# Altium PCB sigjumper.PcbDoc (part 2 of 5)
Units mil, origin at the board's own origin, x right, y up, seen from the top; angles counter-clockwise.
Board outline 7874.02 x 2559.06 mil, 14 copper layers (TOP, P1(GND), S1(V), P2(GND), S2(H), P3(GND), S3(V12/V2V5), S4(VDDR), P4(GND), S5(V), P5(GND), S6(H), P6(GND), BOT), stack 115.1 mil thick; 22 components, 186 nets, 824 pads, 732 vias.
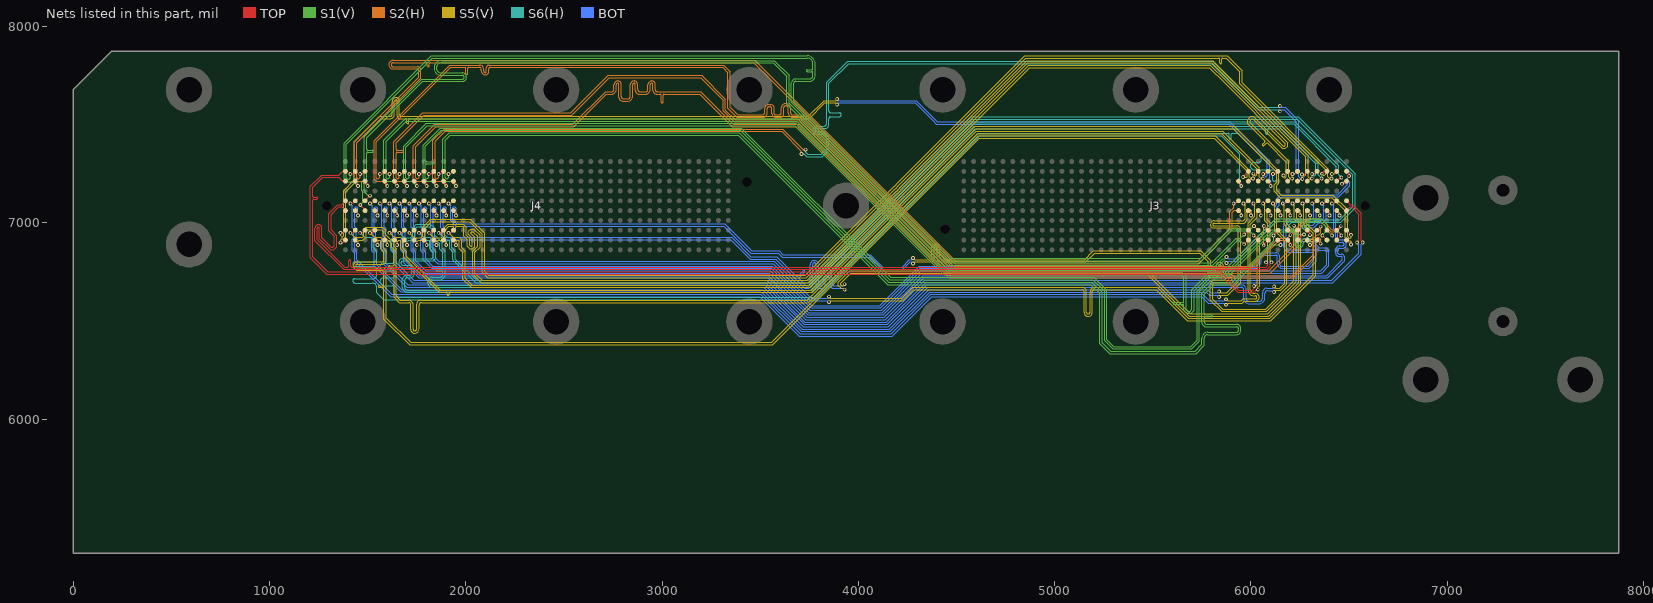
[diagram p14: the nets of this part, all layers, seen from the top]

## Via types
v1: diameter 19, hole 10, TOP to BOT, tented both sides, 732 vias

## Nets (pads, with @x,y where several pads share a name; then routed paths per layer and width w, separated by ;. In a path a pad name is that pad's centre, name@x,y a point inside that pad or via, vN(x,y) a via of type N, cw(c..) or ccw(c..) an arc to the next point about the centre after c; other vN are vias at no path point) (continued)
IL0.DDR.G0.D0_P: J3.72 J4.42 | length 5819.3
  TOP w4: J4.42@1587.2,6911.61 1600.7,6898.11 v1(1600.7,6886.61) ; v1(6111.81,7248.11) 6123.31,7248.11 J3.72@6136.81,7261.61
  S6(H) w4: v1(1600.7,6886.61) 1600.7,6902.52 1607.91,6909.73 1612.91,6909.73 1617.91,6904.73 1617.91,6867.09 1635,6850 1635,6801 cw(c1628,6801) 1628,6794 1582,6794 ccw(c1582,6775) 1563,6775 ccw(c1583,6775) 1583,6755 1625,6755 cw(c1625,6745) 1635,6745 1635,6726 cw(c1628,6726) 1628,6719 1582,6719 ccw(c1582,6700) 1563,6700 ccw(c1583,6700) 1583,6680 1625,6680 cw(c1625,6670) 1635,6670 1635,6640 1655,6620 3777,6620 4611.8,7454.8 5885.2,7454.8 cw(c5885.2,7450) 5890,7450 5890,7430 ccw(c5895,7430) 5895,7425 ccw(c5895,7430) 5900,7430 5900,7449.8 cw(c5905,7449.8) 5905,7454.8 5933.23,7454.8 6053.03,7335 6053.03,7315.03 6045,7307 6010.03,7307 5998,7294.97 5998,7280.03 6008.03,7270 6118.03,7270 6130,7258.03 6130,7218.5 6121.81,7210.31 6116.81,7210.31 6111.81,7215.31 v1(6111.81,7248.11)
IL0.DDR.G0.D1_N: J3.76 J4.46 | length 5774.9
  TOP w4: v1(1562.2,7098.11) 1573.7,7098.11 J4.46@1587.2,7111.61 ; J3.76@6136.81,7061.61 6150.31,7048.11 v1(6150.31,7036.61)
  S5(V) w4: v1(6118,6647) 6126,6655 6151.97,6655 6182.81,6685.84 6182.81,6912.19 6132,6963 6132,7060 6137,7065 6145,7065 6150.31,7059.69 v1(6150.31,7036.61)
  BOT w4: v1(1562.2,7098.11) 1573,7087.32 1573,6975.03 1579,6969.03 1579,6923.97 1571.49,6916.46 1571.49,6857.54 1584,6845.03 1584,6786 1699,6671 3509.15,6671 3509.32,6670.83 3517.27,6670.83 3718.1,6470 4152.73,6470 4353.56,6670.83 5951,6670.83 cw(c5951,6658.83) 5963,6658.83 5963,6614 ccw(c5989,6614) 5989,6588 6042,6588 ccw(c6042,6617) 6071,6617 6071,6639 cw(c6086,6639) 6072.49,6645.52 cw(c6086,6639) 6079.48,6652.51 cw(c6086,6639) 6086,6654 6111,6654 v1(6118,6647)
IL0.DDR.G0.D1_P: J3.75 J4.45 | length 5763.4
  TOP w4: J4.45@1587.2,7061.61 1600.7,7048.11 v1(1600.7,7036.61) ; v1(6111.81,7098.11) 6123.31,7098.11 J3.75@6136.81,7111.61
  S5(V) w4: v1(6111.81,7098.11) 6120,7089.92 6120,6958.03 6170.81,6907.22 6170.81,6690.81 6147,6667 6126,6667 v1(6118,6675)
  BOT w4: 1590,6975 1585,6980 1585,7075 1590,7080 1595,7080 1600.7,7074.3 v1(1600.7,7036.61) ; 1591,6974 1591,6919 1583.49,6911.49 1583.49,6862.51 1596,6850 1596,6790.97 1703.97,6683 3514.12,6683 3514.29,6682.83 3522.24,6682.83 3723.07,6482 4147.76,6482 4348.59,6682.83 5951,6682.83 cw(c5951,6658.83) 5975,6658.83 5975,6614 ccw(c5989,6614) 5989,6600 6042,6600 ccw(c6042,6617) 6059,6617 6059,6644.97 cw(c6081.03,6644.97) 6059.46,6649.46 cw(c6081.03,6644.97) 6076.54,6666.54 cw(c6081.03,6644.97) 6081.03,6667 6110,6667 v1(6118,6675)
IL0.DDR.G0.D2_N: J3.69 J4.49 | length 5982.6
  TOP w4: v1(1562.2,7248.11) 1573.7,7248.11 J4.49@1587.2,7261.61 ; J3.69@6186.81,6911.61 6200.31,6898.11 v1(6200.31,6886.61)
  S2(H) w4: v1(1562.2,7248.11) 1562.2,7232.2 1555,7225 1550,7225 1545,7230 1545,7413.03 1922.97,7791 1996.49,7791 cw(c1996.49,7787.49) 2000,7787.49 2000,7760 ccw(c2005,7760) 2005,7755 ccw(c2005,7760) 2010,7760 2010,7786 cw(c2015,7786) 2015,7791 2070,7791 cw(c2070,7781) 2080,7781 2080,7773 ccw(c2100,7773) 2100,7753 ccw(c2100,7770) 2117,7770 2117,7783.03 cw(c2124.97,7783.03) 2124.97,7791 3309,7791 3335,7765 3335,7583.03 3381.03,7537 3515,7537 ccw(c3515,7557.03) 3533.35,7549 ccw(c3515,7557.03) 3535.03,7557.03 3535.03,7580 cw(c3545.03,7580) 3545.03,7590 3550,7590 cw(c3550,7580) 3560,7580 3560,7556 ccw(c3579,7556) 3579,7537 3599.97,7537 ccw(c3599.97,7557.03) 3620,7557.03 3620,7585 cw(c3630,7585) 3630,7595 cw(c3630,7582) 3643,7582 3643,7559 ccw(c3665,7559) 3665,7537 3712.09,7537 4482.09,6767 6002,6767 6145,6910 6182.81,6910 6200.31,6892.5 v1(6200.31,6886.61)
IL0.DDR.G0.D2_P: J3.68 J4.48 | length 5981.4
  TOP w4: J4.48@1587.2,7211.61 1600.7,7198.11 v1(1600.7,7186.61) ; J3.68@6186.81,6961.61 6200.31,6948.11 v1(6200.31,6936.61)
  S2(H) w4: v1(1600.7,7186.61) 1577.32,7210 1545,7210 1533,7222 1533,7418 1918,7803 2070,7803 cw(c2070,7781) 2092,7781 2092,7773 ccw(c2100,7773) 2100,7765 ccw(c2100,7770) 2105,7770 2105,7788 cw(c2120,7788) 2120,7803 3313.97,7803 3347,7769.97 3347,7588 3386,7549 3510,7549 ccw(c3510,7562) 3523,7562 3523,7580 cw(c3545,7580) 3545,7602 3550,7602 cw(c3550,7580) 3572,7580 3572,7556 ccw(c3579,7556) 3579,7549 3595,7549 ccw(c3595,7562) 3608,7562 3608,7585 cw(c3630,7585) 3630,7607 cw(c3630,7582) 3655,7582 3655,7559 ccw(c3665,7559) 3665,7549 3717.06,7549 4487.06,6779 5997.03,6779 6140.03,6922 6185.7,6922 v1(6200.31,6936.61)
IL0.DDR.G0.D3_N: J3.3 J4.58 | length 5887.9
  TOP w4: J4.58@1637.2,7211.61 1650.7,7198.11 v1(1650.7,7186.61) ; v1(6463.62,7198.23) 6473.42,7198.23 J3.3@6486.81,7211.61
  S1(V) w4: v1(1650.7,7186.61) 1627.32,7210 1595,7210 1583,7222 1583,7420.97 1692.03,7530 3692.12,7530 4451.12,6771 5809.03,6771 5855.03,6817 5867,6817 v1(5875,6825)
  BOT w4: v1(5875,6825) 5884,6816 5920,6816 6120,7016 6120,7081.97 6131.51,7093.49 6131.51,7121.51 6150,7140 6153.51,7143.51 6441.54,7143.51 6490.87,7192.85 6490.87,7200.87 6483.37,7208.37 6473.77,7208.37 v1(6463.62,7198.23)
IL0.DDR.G0.D3_P: J3.2 J4.59 | length 5850.5
  TOP w4: v1(1612.2,7248.11) 1623.7,7248.11 J4.59@1637.2,7261.61 ; J3.2@6486.81,7261.61 6500.2,7248.23 v1(6500.2,7238.42)
  S1(V) w4: v1(1612.2,7248.11) 1612.2,7232.2 1605,7225 1600,7225 1595,7230 1595,7416 1697,7518 3687.15,7518 4446.15,6759 5814,6759 5860,6805 5870,6805 5875,6800 v1(5875,6795)
  BOT w4: v1(5875,6795) 5884,6804 5924.97,6804 6132,7011.03 6132,7077 6140,7085 6143.51,7088.51 6143.51,7116.54 6158.49,7131.51 6446.51,7131.51 6502.87,7187.87 6502.87,7205.85 6499.36,7209.36 6491.86,7216.86 6491.86,7230.09 v1(6500.2,7238.42)
IL0.DDR.G0.D4_N: J3.6 J4.55 | length 5831.8
  TOP w4: J4.55@1637.2,7061.61 1650.7,7048.11 v1(1650.7,7036.61) ; J3.6@6486.81,7061.61 6505.81,7080.61 6512.42,7080.61 6549,7044.03 6549,6906.99 v1(6541,6898.99)
  BOT w4: 1640,6975 1635,6980 1635,7075 1640,7080 1645,7080 1650.7,7074.3 v1(1650.7,7036.61) ; 1641,6974 1641,6919 1633.49,6911.49 1633.49,6862.51 1646,6850 1646,6795.97 1734.97,6707 3524.06,6707 3524.23,6706.83 3532.18,6706.83 3733.01,6506 4137.82,6506 4338.65,6706.83 6411.83,6706.83 6549,6844 6549,6890.99 v1(6541,6898.99)
IL0.DDR.G0.D4_P: J3.5 J4.56 | length 5862.6
  TOP w4: v1(1612.2,7098.11) 1623.7,7098.11 J4.56@1637.2,7111.61 ; J3.5@6486.81,7111.61 6505.81,7092.61 6517.39,7092.61 6561,7049 6561,6906.99 v1(6569,6898.99)
  BOT w4: v1(1612.2,7098.11) 1623,7087.32 1623,6975.03 1629,6969.03 1629,6923.97 1621.49,6916.46 1621.49,6857.54 1634,6845.03 1634,6791 1730,6695 3519.09,6695 3519.26,6694.83 3527.21,6694.83 3728.04,6494 4142.79,6494 4343.62,6694.83 6416.8,6694.83 6442.47,6720.5 6561,6839.03 6561,6890.99 v1(6569,6898.99)
IL0.DDR.G0.S_N: J3.9 J4.52 | length 5862.9
  TOP w4: J4.52@1637.2,6911.61 1650.7,6898.11 v1(1650.7,6886.61) ; J3.9@6486.81,6911.61 v1(6510,6888.42)
  S5(V) w4: v1(1650.7,6886.61) 1650.7,6902.52 1657.91,6909.73 1662.91,6909.73 1667.91,6904.73 1667.91,6867.09 1685,6850 1685,6825 1865,6645 1900,6645 cw(c1900,6640) 1905,6640 1905,6635 ccw(c1910,6635) 1910,6630 ccw(c1910,6635) 1915,6635 1915,6640 cw(c1920,6640) 1920,6645 3762.12,6645 4218.41,7101.29 4219.3,7101.29 4277.71,7159.7 4277.71,7160.59 4595.92,7478.8 5909.23,7478.8 6130,7258.03 6130,7205.49 6118,7193.49 6118,7160.03 6150.03,7128 6412,7128 6480,7060 6480,6923.03 6491.51,6911.51 6495.03,6908 6505,6908 6510,6903 v1(6510,6888.42)
IL0.DDR.G0.S_P: J3.8 J4.53 | length 5872.7
  TOP w4: v1(1612.2,6948.11) 1623.7,6948.11 J4.53@1637.2,6961.61 ; J3.8@6486.81,6961.61 v1(6510,6938.42)
  S5(V) w4: v1(1612.2,6948.11) 1635.59,6924.73 1667.91,6924.73 1679.91,6912.73 1679.91,6872.06 1697,6854.97 1697,6829.97 1869.97,6657 3757.15,6657 4213.43,7113.29 4214.33,7113.29 4265.71,7164.67 4265.71,7165.57 4590.95,7490.8 5914.2,7490.8 6142,7263 6142,7200.52 6134.6,7193.12 6134.6,7192.63 6130,7188.03 6130,7165 6155,7140 6416.97,7140 6492,7064.97 6492,6928 6500,6920 6505,6920 6510,6925 v1(6510,6938.42)
IL0.DDR.G1.D0_N: J3.13 J4.63 | length 5811
  TOP w4: v1(1662.2,6948.11) 1673.7,6948.11 J4.63@1687.2,6961.61 ; J3.13@6436.81,7211.61 6455.2,7230 v1(6460,7230)
  S6(H) w4: v1(1662.2,6948.11) 1687.09,6923.23 1720,6923.23 1730,6933.23 1730,6973.97 1748.03,6992 1819.97,6992 1838.49,6973.49 1842,6969.97 1842,6935 1880,6897 1880,6870 1895,6855 1895,6735 cw(c1870,6735) 1870,6710 1865,6710 1828.96,6710 ccw(c1829,6700) 1819,6700 1819,6692 ccw(c1829,6692) 1829,6682 3753.06,6682 4585.86,7514.8 6222.17,7514.8 6443.49,7293.49 6447,7289.97 6447,7243 v1(6460,7230)
IL0.DDR.G1.D0_P: J3.12 J4.62 | length 5810.9
  TOP w4: J4.62@1687.2,6911.61 1700.7,6898.11 v1(1700.7,6886.61) ; v1(6411.81,7248.11) 6423.31,7248.11 J3.12@6436.81,7261.61
  S6(H) w4: v1(1700.7,6886.61) 1700.7,6902.52 1709.41,6911.23 1724.97,6911.23 1742,6928.26 1742,6969 1753,6980 1815,6980 1830,6965 1830,6930.03 1868,6892.03 1868,6865.03 1883,6850.03 1883,6770 cw(c1878,6770) 1878,6765 1855,6765 ccw(c1855,6760) 1850,6760 ccw(c1855,6760) 1855,6755 1878,6755 cw(c1878,6750) 1883,6750 1883,6735 cw(c1870,6735) 1870,6722 1829,6722 ccw(c1829,6700) 1807,6700 1807,6692 ccw(c1829,6692) 1829,6670 3758.03,6670 4590.83,7502.8 6217.2,7502.8 6435,7285 6435,7259.8 6423.31,7248.11 v1(6411.81,7248.11)
IL0.DDR.G1.D1_N: J3.16 J4.66 | length 5773.8
  TOP w4: v1(1662.2,7098.11) 1673.7,7098.11 J4.66@1687.2,7111.61 ; J3.16@6436.81,7061.61 6450.31,7048.11 v1(6450.31,7036.61)
  BOT w4: v1(1662.2,7098.11) 1673,7087.32 1673,6975.03 1679,6969.03 1679,6923.97 1671.49,6916.46 1671.49,6857.54 1684,6845.03 1684,6796 1761,6719 3529.03,6719 3529.2,6718.83 3537.15,6718.83 3737.98,6518 4132.85,6518 4333.68,6718.83 6390.8,6718.83 6477,6805.03 6477,6823 ccw(c6460,6823) 6460,6840 6448,6840 cw(c6448,6845) 6443,6845 6443,6860 cw(c6453,6860) 6453,6870 6466,6870 ccw(c6466,6890) 6486,6890 ccw(c6464,6890) 6464,6912 6451,6912 cw(c6451,6920) 6443,6920 6443,6959 6433,6969 6433,7051 6437,7055 6443.42,7055 6450.31,7048.11 v1(6450.31,7036.61)
IL0.DDR.G1.D1_P: J3.15 J4.65 | length 5778.4
  TOP w4: J4.65@1687.2,7061.61 1700.7,7048.11 v1(1700.7,7036.61) ; v1(6411.81,7098.11) 6423.31,7098.11 J3.15@6436.81,7111.61
  BOT w4: 1690,6975 1685,6980 1685,7075 1690,7080 1695,7080 1700.7,7074.3 v1(1700.7,7036.61) ; 1691,6974 1691,6919 1683.49,6911.49 1683.49,6862.51 1696,6850 1696,6800.97 1765.97,6731 3534,6731 3534.17,6730.83 3542.12,6730.83 3742.95,6530 4127.88,6530 4328.71,6730.83 6385.83,6730.83 6465,6810 6465,6823 ccw(c6460,6823) 6460,6828 6448,6828 cw(c6448,6845) 6431,6845 6431,6860 cw(c6453,6860) 6453,6882 6466,6882 ccw(c6466,6890) 6474,6890 ccw(c6464,6890) 6464,6900 6455.97,6900 cw(c6455.97,6924.97) 6431,6924.97 6431,6954.03 6421,6964.03 6421,7088.93 v1(6411.81,7098.11)
IL0.DDR.G1.D2_N: J3.19 J4.69 | length 5935.9
  TOP w4: v1(1662.2,7248.11) 1673.7,7248.11 J4.69@1687.2,7261.61 ; J3.19@6436.81,6911.61 v1(6460,6934.8)
  S2(H) w4: v1(1662.2,7248.11) 1662.2,7232.2 1655,7225 1650,7225 1645,7230 1645,7355 cw(c1650,7355) 1650,7360 1680,7360 ccw(c1680,7365) 1685,7365 ccw(c1680,7365) 1680,7370 1650,7370 cw(c1650,7375) 1645,7375 1645,7408.03 1784.97,7548 2540,7548 2560,7568 2730,7738 3197,7738 3311,7624 3311,7569 3367,7513 3702.15,7513 4472.15,6743 6098,6743 6242,6887 6242,6967 6283,7008 6352.03,7008 6407.03,6953 6445,6953 6460,6938 v1(6460,6934.8)
IL0.DDR.G1.D2_P: J3.18 J4.68 | length 5929.8
  TOP w4: J4.68@1687.2,7211.61 1700.7,7198.11 v1(1700.7,7186.61) ; J3.18@6436.81,6961.61 v1(6457.5,6982.3)
  S2(H) w4: v1(1700.7,7186.61) 1677.32,7210 1645,7210 1633,7222 1633,7413 1780,7560 2535.03,7560 2725.03,7750 3201.97,7750 3323,7628.97 3323,7573.97 3371.97,7525 3707.12,7525 4477.12,6755 6090.92,6755 6230,6894.08 6230,6971.97 6278.03,7020 6357,7020 6412,6965 6445,6965 6457.5,6977.5 v1(6457.5,6982.3)
IL0.DDR.G1.D3_N: J3.23 J4.73 | length 5846.3
  TOP w4: v1(1712.2,6948.11) 1723.7,6948.11 J4.73@1737.2,6961.61 ; J3.23@6386.81,7211.61 6400.2,7225 v1(6410,7225)
  S5(V) w4: v1(1712.2,6948.11) 1737.09,6923.23 1770,6923.23 1780.59,6933.82 1780.59,6977.56 1816.51,7013.49 1820.03,7017 2024.97,7017 2028.49,7013.49 2097,6944.97 2097,6753 2118,6732 3730.32,6732 4183.61,7185.29 4184.51,7185.29 4193.71,7194.49 4193.71,7195.39 4848.32,7850 5880,7850 5955,7775 5955,7711.97 6392,7274.97 6392,7233.2 6400.2,7225 v1(6410,7225)
IL0.DDR.G1.D3_P: J3.22 J4.72 | length 5836.6
  TOP w4: J4.72@1737.2,6911.61 1750.7,6898.11 v1(1750.7,6886.61) ; v1(6360.63,7249.37) 6372.87,7261.61 J3.22@6386.81,7261.61
  S5(V) w4: v1(1750.7,6886.61) 1750.7,6902.52 1759.41,6911.23 1774.97,6911.23 1792.59,6928.85 1792.59,6972.59 1825,7005 2020,7005 2085,6940 2085,6748.03 2113.03,6720 3735.3,6720 4188.58,7173.29 4189.48,7173.29 4205.71,7189.52 4205.71,7190.42 4853.3,7838 5835,7838 cw(c5835,7833) 5840,7833 5840,7815 ccw(c5845,7815) 5845,7810 ccw(c5845,7815) 5850,7815 5850,7833 cw(c5855,7833) 5855,7838 5875.03,7838 5943,7770.03 5943,7707 6380,7270 6380,7247.58 6373.71,7241.29 6368.71,7241.29 v1(6360.63,7249.37)
IL0.DDR.G1.D4_N: J3.26 J4.76 | length 5777.1
  TOP w4: v1(1712.2,7098.11) 1723.7,7098.11 J4.76@1737.2,7111.61 ; J3.26@6386.81,7061.61 6400.31,7048.11 v1(6400.31,7036.61)
  BOT w4: v1(1712.2,7098.11) 1723,7087.32 1723,6975.03 1729,6969.03 1729,6923.97 1721.49,6916.46 1721.49,6857.54 1734,6845.03 1734,6801 1792,6743 3546.92,6743 3747.92,6542 4122.91,6542 4323.91,6743 6359.97,6743 6397,6780.03 6397,6858 6383,6872 6348,6872 6335,6885 6328.03,6891.97 6328.03,6898.09 6309.12,6917 6248,6917 6240,6925 6240,6960 6255,6975 6320,6975 6345,7000 6364.97,7000 6383,7018.03 6383,7051 6387,7055 6393.43,7055 6400.31,7048.11 v1(6400.31,7036.61)
IL0.DDR.G1.D4_P: J3.25 J4.75 | length 5783.7
  TOP w4: J4.75@1737.2,7061.61 1750.7,7048.11 v1(1750.7,7036.61) ; v1(6361.81,7098.11) 6373.31,7098.11 J3.25@6386.81,7111.61
  BOT w4: 1740,6975 1735,6980 1735,7075 1740,7080 1745,7080 1750.7,7074.3 v1(1750.7,7036.61) ; 1741,6974 1741,6919 1733.49,6911.49 1733.49,6862.51 1746,6850 1746,6805.97 1796.97,6755 3551.89,6755 3752.89,6554 4117.94,6554 4318.94,6755 6355,6755 6385,6785 6385,6853.03 6378.03,6860 6343.03,6860 6316.03,6887 6316.03,6893.12 6304.15,6905 6243.03,6905 6228,6920.03 6228,6964.97 6246.51,6983.49 6250.03,6987 6315.03,6987 6340.03,7012 6360,7012 6371,7023 6371,7088.93 v1(6361.81,7098.11)
IL0.DDR.G1.S_N: J3.29 J4.79 | length 5965.2
  TOP w4: v1(1712.2,7248.11) 1723.7,7248.11 J4.79@1737.2,7261.61 ; v1(6363.42,6935) J3.29@6386.81,6911.61
  S1(V) w4: v1(1712.2,7248.11) 1712.2,7232.2 1705,7225 1700,7225 1695,7230 1695,7385 1804,7494 3677.21,7494 4436.21,6735 5645.03,6735 5658,6722.03 5658,6600 cw(c5653,6600) 5653,6595 5610,6595 ccw(c5610,6590) 5605,6590 ccw(c5610,6590) 5610,6585 5653,6585 cw(c5653,6580) 5658,6580 5658,6555.03 5675.03,6538 5694.97,6538 5710,6553.03 5710,6653.94 5789.06,6733 5854.97,6733 6129.97,7008 6250,7008 cw(c6250,6998) 6260,6998 6260,6983 ccw(c6280,6983) 6280,6963 ccw(c6280,6980) 6297,6980 6297,7004.97 cw(c6300.03,7004.97) 6300.03,7008 6354.03,7008 6380,6982.03 6380,6955 6363.42,6938.42 v1(6363.42,6935)
IL0.DDR.G1.S_P: J3.28 J4.78 | length 5964.2
  TOP w4: J4.78@1737.2,7211.61 1750.7,7198.11 v1(1750.7,7186.61) ; J3.28@6386.81,6961.61 v1(6413.43,6935)
  S1(V) w4: v1(1750.7,7186.61) 1727.32,7210 1695,7210 1683,7222 1683,7389.97 1799.03,7506 3682.18,7506 4441.18,6747 5650,6747 5670,6727 5670,6560 5680,6550 5690,6550 5698,6558 5698,6658.91 5784.09,6745 5850,6745 6125,7020 6250,7020 cw(c6250,6998) 6272,6998 6272,6983 ccw(c6280,6983) 6280,6975 ccw(c6280,6980) 6285,6980 6285,7000 cw(c6305,7000) 6305,7020 6359,7020 6392,6987 6392,6956.43 v1(6413.43,6935)
IL0.DDR.G2.D0_N: J3.33 J4.83 | length 5810.7
  TOP w4: v1(1762.2,6948.11) 1773.7,6948.11 J4.83@1787.2,6961.61 ; J3.33@6336.81,7211.61 6350.2,7225 v1(6360,7225)
  S6(H) w4: v1(1762.2,6948.11) 1785.59,6924.73 1817.91,6924.73 1829.91,6912.73 1829.91,6872.06 1847,6854.97 1847,6825 cw(c1826.97,6825) 1826.97,6804.97 1680,6804.97 ccw(c1680,6794.97) 1670,6794.97 ccw(c1683,6794.97) 1683,6781.97 1715,6781.97 cw(c1715,6759.97) 1737,6759.97 1737,6740 cw(c1716.97,6740) 1716.97,6719.97 1704,6719.97 ccw(c1704,6704.97) 1689,6704.97 1689,6670 ccw(c1702,6670) 1702,6657 3762,6657 4595.8,7490.8 6156.17,7490.8 6342,7304.97 6342,7243 v1(6360,7225)
IL0.DDR.G2.D0_P: J3.32 J4.82 | length 5804.3
  TOP w4: J4.82@1787.2,6911.61 1800.7,6898.11 v1(1800.7,6886.61) ; v1(6311.81,7248.11) 6323.31,7248.11 J3.32@6336.81,7261.61
  S6(H) w4: v1(1800.7,6886.61) 1800.7,6905.7 1804.73,6909.73 1812.91,6909.73 1817.91,6904.73 1817.91,6867.09 1835,6850 1835,6829.97 cw(c1822,6829.97) 1822,6816.97 1680,6816.97 ccw(c1680,6794.97) 1658,6794.97 ccw(c1683,6794.97) 1683,6769.97 1715,6769.97 cw(c1715,6759.97) 1725,6759.97 1725,6744.97 cw(c1712,6744.97) 1712,6731.97 1699.03,6731.97 ccw(c1699.03,6709.94) 1677,6709.94 1677,6670 ccw(c1702,6670) 1702,6645 3766.97,6645 4600.77,7478.8 6070,7478.8 cw(c6070,7473.8) 6075,7473.8 6075,7455 ccw(c6080,7455) 6080,7450 ccw(c6080,7455) 6085,7455 6085,7473.8 cw(c6090,7473.8) 6090,7478.8 6151.2,7478.8 6330,7300 6330,7245 6325,7240 6319.93,7240 v1(6311.81,7248.11)
IL0.DDR.G2.D1_N: J3.36 J4.86 | length 5766
  TOP w4: v1(1762.2,7098.11) 1773.7,7098.11 J4.86@1787.2,7111.61 ; J3.36@6336.81,7061.61 6350.31,7048.11 v1(6350.31,7036.61)
  BOT w4: v1(1762.2,7098.11) 1773,7087.32 1773,6975.03 1779,6969.03 1779,6923.97 1771.49,6916.46 1771.49,6857.54 1784,6845.03 1784,6811 1828,6767 3556.86,6767 3757.86,6566 4112.97,6566 4313.97,6767 6019,6767 ccw(c6019,6800) 6052,6800 6052,6822 cw(c6065,6822) 6065,6835 6125,6835 cw(c6125,6825) 6135,6825 6135,6791.97 ccw(c6159.97,6791.97) 6159.97,6767 6296,6767 6332,6803 6332,6845 ccw(c6315,6845) 6315,6862 6193,6862 cw(c6193,6875) 6180,6875 6180,6985 cw(c6200,6985) 6200,7005 6307.03,7005 ccw(c6307.03,7029.97) 6332,7029.97 6332,7050 6337,7055 6343.43,7055 6350.31,7048.11 v1(6350.31,7036.61)
IL0.DDR.G2.D1_P: J3.35 J4.85 | length 5776.1
  TOP w4: J4.85@1787.2,7061.61 1800.7,7048.11 v1(1800.7,7036.61) ; v1(6311.81,7098.11) 6323.31,7098.11 J3.35@6336.81,7111.61
  BOT w4: 1790,6975 1785,6980 1785,7075 1790,7080 1795,7080 1800.7,7074.3 v1(1800.7,7036.61) ; 1791,6974 1791,6919 1783.49,6911.49 1783.49,6862.51 1796,6850 1796,6815.97 1832.97,6779 3561.83,6779 3762.83,6578 4108,6578 4309,6779 6019,6779 ccw(c6019,6800) 6040,6800 6040,6822 cw(c6065,6822) 6065,6847 6125,6847 cw(c6125,6825) 6147,6825 6147,6787 ccw(c6155,6787) 6155,6779 6291.03,6779 6320,6807.97 6320,6845 ccw(c6315,6845) 6315,6850 6193,6850 cw(c6193,6875) 6168,6875 6168,6985 cw(c6200,6985) 6200,7017 6312,7017 ccw(c6312,7025) 6320,7025 6320,7089.93 v1(6311.81,7098.11)
IL0.DDR.G2.D2_N: J3.39 J4.89 | length 5928.6
  TOP w4: v1(1762.2,7248.11) 1773.7,7248.11 J4.89@1787.2,7261.61 ; J3.39@6336.81,6911.61 v1(6355,6893.43)
  S2(H) w4: v1(1762.2,7248.11) 1762.2,7232.2 1755,7225 1750,7225 1745,7230 1745,7388.03 1845.97,7489 2550.97,7489 2716.97,7655 2742,7655 ccw(c2742,7680) 2767,7680 2767,7702 cw(c2775,7702) 2775,7710 cw(c2775,7705) 2780,7705 2780,7639.03 ccw(c2800.03,7639.03) 2800.03,7619 2825,7619 ccw(c2825,7644) 2850,7644 2850,7702 cw(c2858,7702) 2858,7710 cw(c2858,7705) 2863,7705 2863,7675.03 ccw(c2883.03,7675.03) 2883.03,7655 2915,7655 ccw(c2915,7680) 2940,7680 2940,7702 cw(c2948,7702) 2948,7710 cw(c2948,7705) 2953,7705 2953,7675.03 ccw(c2973.03,7675.03) 2973.03,7655 2990,7655 cw(c2990,7650) 2995,7650 2995,7615 ccw(c3000,7615) 3000,7610 ccw(c3000,7615) 3005,7615 3005,7650 cw(c3010,7650) 3010,7655 3191.06,7655 3357.06,7489 3692.21,7489 4462.21,6719 6215.97,6719 6332,6835.03 6332,6917 6340,6925 6345,6925 6355,6915 v1(6355,6893.43)
IL0.DDR.G2.D2_P: J3.38 J4.88 | length 5930.3
  TOP w4: J4.88@1787.2,7211.61 1800.7,7198.11 v1(1800.7,7186.61) ; J3.38@6336.81,6961.61 v1(6355.2,6980) v1@6360,6984.8
  S2(H) w4: v1(1800.7,7186.61) 1777.32,7210 1745,7210 1733,7222 1733,7393 1841,7501 2546,7501 2712,7667 2742,7667 ccw(c2742,7680) 2755,7680 2755,7702 cw(c2775,7702) 2775,7722 cw(c2775,7705) 2792,7705 2792,7644 ccw(c2805,7644) 2805,7631 2825,7631 ccw(c2825,7644) 2838,7644 2838,7702 cw(c2858,7702) 2858,7722 cw(c2858,7705) 2875,7705 2875,7680 ccw(c2888,7680) 2888,7667 2915,7667 ccw(c2915,7680) 2928,7680 2928,7702 cw(c2948,7702) 2948,7722 cw(c2948,7705) 2965,7705 2965,7680 ccw(c2978,7680) 2978,7667 3196.03,7667 3362.03,7501 3697.18,7501 4467.18,6731 6211,6731 6320,6840 6320,6921.97 6336.83,6938.8 6345,6938.8 6355.2,6948.99 v1(6355.2,6980)
IL0.DDR.G2.D3_N: J3.43 J4.93 | length 5847.6
  TOP w4: v1(1812.2,6948.11) 1823.7,6948.11 J4.93@1837.2,6961.61 ; J3.43@6286.81,7211.61 6300.2,7225 v1(6310,7225)
  S5(V) w4: v1(1812.2,6948.11) 1837.09,6923.23 1875,6923.23 1880,6928.23 1880,6964.97 1908.03,6993 1987,6993 2002,6978 2002,6934.97 2020,6916.97 2020,6885 2025,6880 2030,6880 2033,6883 2033,6920.03 2013,6940.03 2013,6954.97 2016.51,6958.49 2025.03,6967 2041.03,6967 2073,6935.03 2073,6876 2047,6850 2047,6743 2083,6707 3739.27,6707 4193.55,7161.29 4194.45,7161.29 4217.71,7184.55 4217.71,7185.45 4858.27,7826 5806.02,7826 6292,7340.02 6292,7233.2 6300.2,7225 v1(6310,7225)
IL0.DDR.G2.D3_P: J3.42 J4.92 | length 5841.5
  TOP w4: J4.92@1837.2,6911.61 1850.7,6898.11 v1(1850.7,6886.61) ; v1(6260.2,7245) 6265.2,7240 J3.42@6286.81,7261.61
  S5(V) w4: v1(1850.7,6886.61) 1850.7,6902.52 1859.41,6911.23 1879.97,6911.23 1892,6923.26 1892,6960 1913,6981 1935,6981 cw(c1935,6976) 1940,6976 1940,6960 ccw(c1945,6960) 1945,6955 ccw(c1945,6960) 1950,6960 1950,6976 cw(c1955,6976) 1955,6981 1982.03,6981 1990,6973.03 1990,6930 2008,6912 2008,6880.03 2020.03,6868 2034.97,6868 2045,6878.03 2045,6925 2025,6945 2025,6950 2030,6955 2036.06,6955 2061,6930.06 2061,6880.97 2035,6854.97 2035,6738.03 2078.03,6695 3744.24,6695 4198.52,7149.29 4199.42,7149.29 4229.71,7179.58 4229.71,7180.48 4863.24,7814 5801.05,7814 6280,7335.05 6280,7245 6275,7240 6265.2,7240 v1(6260.2,7245)
IL0.DDR.G2.D4_N: J3.46 J4.96 | length 5775.8
  TOP w4: v1(1812.2,7098.11) 1823.7,7098.11 J4.96@1837.2,7111.61 ; J3.46@6286.81,7061.61 6300.31,7048.11 v1(6300.31,7036.61)
  S5(V) w4: v1(3850,6595) 3858,6603 4226.94,6603 4281.94,6658 5140,6658 cw(c5140,6648) 5150,6648 5150,6543 ccw(c5170,6543) 5170,6523 ccw(c5170,6545) 5192,6545 5192,6650 cw(c5200,6650) 5200,6658 5517.15,6658 5675.15,6500 6099.85,6500 6330,6730.15 6330,6950 6282,6998 6282,7061 6287,7066 6295,7066 6300,7061 6300.31,7060.69 v1(6300.31,7036.61)
  BOT w4: v1(1812.2,7098.11) 1823,7087.32 1823,6971 1829,6965 1829,6923.97 1821.49,6916.46 1821.49,6857.54 1834,6845.03 1834,6814.03 1857.03,6791 3566.8,6791 3754.8,6603 3842,6603 v1(3850,6595)
IL0.DDR.G2.D4_P: J3.45 J4.95 | length 5780.1
  TOP w4: J4.95@1837.2,7061.61 1850.7,7048.11 v1(1850.7,7036.61) ; v1(6261.81,7098.11) 6273.31,7098.11 J3.45@6286.81,7111.61
  S5(V) w4: v1(3850,6623) 3858,6615 4221.97,6615 4276.97,6670 5140,6670 cw(c5140,6648) 5162,6648 5162,6543 ccw(c5170,6543) 5170,6535 ccw(c5170,6545) 5180,6545 5180,6645.03 cw(c5204.97,6645.03) 5204.97,6670 5522.12,6670 5680.12,6512 6094.88,6512 6318,6735.12 6318,6900 ccw(c6313,6900) 6313,6905 6307,6905 cw(c6307,6910) 6302,6910 cw(c6307,6910) 6307,6915 6310,6915 ccw(c6310,6923) 6318,6923 6318,6945.03 6270,6993.03 6270,7089.92 v1(6261.81,7098.11)
  BOT w4: v1(1850.7,7036.61) 1850.7,7074.3 1845,7080 1840,7080 1835,7075 1835,6975.97 1841,6969.97 1841,6919 1833.49,6911.49 1833.49,6862.51 1846,6850 1846,6819 1862,6803 3571.77,6803 3759.77,6615 3842,6615 v1(3850,6623)
IL0.DDR.G2.S_N: J3.49 J4.99 | length 5962.3
  TOP w4: v1(1812.2,7248.11) 1823.7,7248.11 J4.99@1837.2,7261.61 ; J3.49@6286.81,6911.61 6300.31,6898.11 v1(6300.31,6886.61)
  S1(V) w4: v1(1812.2,7248.11) 1812.2,7232.2 1805,7225 1800,7225 1795,7230 1795,7295 cw(c1800,7295) 1800,7300 1830,7300 ccw(c1830,7305) 1835,7305 ccw(c1830,7305) 1830,7310 1800,7310 cw(c1800,7315) 1795,7315 1795,7390 1875,7470 3398.03,7470 4159.03,6709 5194.94,6709 5254,6649.94 5254,6399.03 5296.03,6357 5697,6357 5737,6397 5737,6647 5799,6709 5865.97,6709 6109.97,6953 6212,6953 cw(c6212,6940) 6225,6940 6225,6893 ccw(c6245,6893) 6245,6873 ccw(c6245,6895) 6267,6895 cw(c6277,6895) 6274.99,6904.8 cw(c6277,6895) 6277,6905 6281.93,6905 v1(6300.31,6886.61)
IL0.DDR.G2.S_P: J3.48 J4.98 | length 5964.7
  TOP w4: J4.98@1837.2,7211.61 1850.7,7198.11 v1(1850.7,7186.61) ; J3.48@6286.81,6961.61 6300.31,6948.11 v1(6300.31,6936.61)
  S1(V) w4: v1(1850.7,7186.61) 1827.32,7210 1795,7210 1783,7222 1783,7394.97 1870.03,7482 3403,7482 4164,6721 5199.91,6721 5266,6654.91 5266,6404 5301,6369 5692.03,6369 5725,6401.97 5725,6651.97 5794.03,6721 5861,6721 6105,6965 6212,6965 cw(c6212,6940) 6237,6940 6237,6893 ccw(c6245,6893) 6245,6885 ccw(c6245,6895) 6255,6895 6255,6897.97 cw(c6274.03,6897.97) 6274.03,6917 6280.7,6917 v1(6300.31,6936.61)
IL0.DDR.G3.D0_N: J3.58 J4.103 | length 5955.9
  TOP w4: v1(1862.2,6948.11) 1873.7,6948.11 J4.103@1887.2,6961.61 ; v1(6220,6985) 6220,6978.42 J3.58@6236.81,6961.61 J3.58@6243.39,6961.61
  S6(H) w4: v1(1862.2,6948.11) 1885.59,6924.73 1917.91,6924.73 1929.91,6912.73 1929.91,6872.06 1947,6854.97 1947,6814.97 2054.97,6707 3744.12,6707 4575.92,7538.8 6241.2,7538.8 6530,7250 6530,7075 6458,7003 6206.97,7003 6192,6988.03 6192,6973.39 6200.39,6965 6210,6965 6220,6975 v1(6220,6985)
IL0.DDR.G3.D0_P: J3.59 J4.102 | length 5979.6
  TOP w4: J4.102@1887.2,6911.61 1900.7,6898.11 v1(1900.7,6886.61) ; J3.59@6236.81,6911.61 6265.2,6940 6267.6,6937.6 6270,6935.2 v1(6270,6940)
  S6(H) w4: v1(1900.7,6886.61) 1900.7,6902.52 1907.91,6909.73 1912.91,6909.73 1917.91,6904.73 1917.91,6867.09 1935,6850 1935,6810 2050,6695 3749.09,6695 4580.89,7526.8 6236.23,7526.8 6518,7245.03 6518,7079.97 6453.03,7015 6202,7015 6180,6993 6180,6968.42 6195.42,6953 6217,6953 6230,6940 v1(6270,6940)
IL0.DDR.G3.D1_N: J3.55 J4.106 | length 5699.2
  TOP w4: v1(1862.2,7098.11) 1873.7,7098.11 J4.106@1887.2,7111.61 ; v1(6211.81,7098.11) 6223.31,7098.11 J3.55@6236.81,7111.61
  S5(V) w4: 3922,6667 3910.03,6667 3906.51,6670.51 3898,6679.03 3898,6696.03 3956.8,6754.83 5471.23,6754.83 5690.06,6536 6084.94,6536 6242,6693.06 6242,6996.03 6220,7018.03 6220,7089.92 v1(6211.81,7098.11)
  BOT w4: v1(1862.2,7098.11) 1873,7087.32 1873,6975.03 1879,6969.03 1879,6935.03 1901.03,6913 3350,6913 3448,6815 3580,6815 3728,6667 3745,6667 ccw(c3745,6689) 3767,6689 3767,6787 cw(c3775,6787) 3775,6795 3777,6795 cw(c3777,6787) 3785,6787 3785,6682.03 ccw(c3800.03,6682.03) 3800.03,6667 3815,6667 ccw(c3815,6684) 3832,6684 3832,6707 cw(c3845,6707) 3845,6720 ; 3846,6720 cw(c3846,6709) 3857,6709 3857,6680.03 ccw(c3870.03,6680.03) 3870.03,6667 3922,6667 v1(3930,6659)
IL0.DDR.G3.D1_P: J3.56 J4.105 | length 5784.9
  TOP w4: J4.105@1887.2,7061.61 1900.7,7048.11 v1(1900.7,7036.61) ; J3.56@6236.81,7061.61 6250.31,7048.11 v1(6250.31,7036.61)
  S5(V) w4: v1(3930,6687) 3922,6679 3915,6679 3910,6684 3910,6691.06 3961.77,6742.83 5466.26,6742.83 5685.09,6524 6089.91,6524 6254,6688.09 6254,7001 6232,7023 6232,7060 6237,7065 6245,7065 6250.31,7059.69 v1(6250.31,7036.61)
  BOT w4: 1890,6975 1885,6980 1885,7075 1890,7080 1895,7080 1900.7,7074.3 v1(1900.7,7036.61) ; 1891,6974 1891,6940 1906,6925 3354.97,6925 3452.97,6827 3584.97,6827 3681.97,6730 ccw(c3687.63,6735.7) 3693.3,6730.02 3718.23,6754.95 cw(c3721.77,6751.42) 3725.3,6754.95 cw(c3721.77,6751.42) 3725.3,6747.88 3698.23,6720.81 ccw(c3701.77,6717.27) 3696.77,6717.25 ccw(c3701.77,6717.27) 3698.23,6713.74 3732.97,6679 3745,6679 ccw(c3745,6689) 3755,6689 3755,6787 cw(c3775,6787) 3775,6807 3777,6807 cw(c3777,6787) 3797,6787 3797,6687 ccw(c3805,6687) 3805,6679 3812,6679 ccw(c3812,6687) 3820,6687 3820,6707 cw(c3845,6707) 3845,6732 ; 3846,6732 cw(c3846,6709) 3869,6709 3869,6685 ccw(c3875,6685) 3875,6679 3922,6679 v1(3930,6687)
IL0.DDR.G3.D2_N: J3.52 J4.109 | length 5776.2
  TOP w4: v1(1862.2,7248.11) 1873.7,7248.11 J4.109@1887.2,7261.61 ; v1(6211.81,7248.11) 6223.31,7248.11 J3.52@6236.81,7261.61
  S2(H) w4: v1(1862.2,7248.11) 1862.2,7232.2 1855,7225 1850,7225 1845,7230 1845,7415 1895,7465 3609.03,7465 3709.51,7364.51 ; v1(3710,7350.5) 3710,7364.03
  S6(H) w4: v1(3710,7350.5) 3722.73,7350.5 3737.63,7335.6 3815.6,7335.6 3850,7370 3850,7432 ccw(c3820,7432) 3820,7462 3788,7462 cw(c3788,7470) 3780,7470 cw(c3790,7470) 3790,7480 3830,7480 ccw(c3830,7500) 3850,7500 3850,7530 cw(c3860,7530) 3860,7540 3903,7540 ccw(c3903,7550) 3913,7550 ccw(c3903,7550) 3903,7560 3860,7560 cw(c3860,7570) 3850,7570 3850,7710 3950,7810 5800.8,7810 6035.8,7575 6139,7575 v1(6147,7567)
  BOT w4: v1(6147,7567) 6155,7575 6170,7575 6230,7515 6230,7254.8 6223.31,7248.11 v1(6211.81,7248.11)
IL0.DDR.G3.D2_P: J3.53 J4.108 | length 5774.4
  TOP w4: J4.108@1887.2,7211.61 1900.7,7198.11 v1(1900.7,7186.61) ; J3.53@6236.81,7211.61 6239.21,7209.21 v1@6253.9,7223.9
  S2(H) w4: v1(1900.7,7186.61) 1877.32,7210 1845,7210 1833,7222 1833,7419.97 1890.03,7477 3614,7477 3719.28,7371.72 v1(3731.21,7371.72)
  S6(H) w4: v1(3731.21,7371.72) 3731.21,7358.99 3742.6,7347.6 3810.63,7347.6 3838,7374.97 3838,7432 ccw(c3820,7432) 3820,7450 3788,7450 cw(c3788,7470) 3768,7470 cw(c3790,7470) 3790,7492 3825.03,7492 ccw(c3825.03,7504.97) 3838,7504.97 3838,7714.97 3841.51,7718.49 3945.03,7822 5805.77,7822 5829.29,7798.49 6040.77,7587 6139,7587 v1(6147,7595)
  BOT w4: v1(6147,7595) 6154,7588 ; 6155,7587 6174.97,7587 6242,7519.97 6242,7233 6252.5,7222.5 v1(6261.63,7222.5)
IL0.DDR.G3.D3_N: J3.63 J4.113 | length 5847.2
  TOP w4: v1(1912.2,6948.11) 1923.7,6948.11 J4.113@1937.2,6961.61 ; J3.63@6186.81,7211.61 6200.2,7225 v1(6210,7225)
  S5(V) w4: v1(1912.2,6948.11) 1935.59,6924.73 1967.91,6924.73 1979.91,6912.73 1979.91,6872.06 1997,6854.97 1997,6718 2033,6682 3748.21,6682 4203.49,7137.29 4204.39,7137.29 4241.71,7174.61 4241.71,7175.51 4868.21,7802 5793,7802 5870.25,7724.75 6187,7408 6187,7390.03 6174.97,7378 6160.03,7378 6009.01,7529.01 6004.01,7529.01 5995,7520 5995,7510 6192,7313 6192,7233 6200,7225 v1(6210,7225)
IL0.DDR.G3.D3_P: J3.62 J4.112 | length 5839.3
  TOP w4: J4.112@1937.2,6911.61 1950.7,6898.11 v1(1950.7,6886.61) ; v1(6165,7240) 6165.2,7240 J3.62@6186.81,7261.61
  S5(V) w4: v1(1950.7,6886.61) 1950.7,6902.52 1957.91,6909.73 1962.91,6909.73 1967.91,6904.73 1967.91,6867.09 1985,6850 1985,6713.03 2028.03,6670 3753.18,6670 4208.46,7125.29 4209.36,7125.29 4253.71,7169.64 4253.71,7170.54 4873.18,7790 5788.03,7790 5863.52,7714.51 6175,7403.03 6175,7395 6170,7390 6165,7390 6017.5,7537.5 6013.99,7541.01 5999.04,7541.01 5983,7524.97 5983,7505.03 6070.02,7418.01 cw(c6066.46,7414.49) 6070,7410.96 6059.39,7400.35 ccw(c6062.93,7396.82) 6059.39,7393.28 ccw(c6062.93,7396.82) 6066.46,7393.28 6077.07,7403.89 cw(c6080.61,7400.35) 6084.14,7403.89 6180,7308.03 6180,7235 6175,7230 6170,7230 6165,7235 v1(6165,7240)
IL0.DDR.G3.D4_N: J3.66 J4.116 | length 5775.7
  TOP w4: v1(1912.2,7098.11) 1923.7,7098.11 J4.116@1937.2,7111.61 ; J3.66@6186.81,7061.61 6200.31,7048.11 v1(6200.31,7036.61)
  S5(V) w4: v1(4278,6792) 4286,6800 4367,6800 ccw(c4367,6820) 4387,6820 4387,6873 cw(c4395,6873) 4395,6881 cw(c4395,6874) 4402,6874 4402,6818.03 ccw(c4420.03,6818.03) 4420.03,6800 5158.17,6800 5203.17,6845 5738,6845 5783,6800 5783,6740 ccw(c5801,6740) 5801,6722 5816,6722 ccw(c5816,6739) 5818.18,6722.14 ccw(c5816,6739) 5833,6739 5833,6778 cw(c5840,6778) 5840,6785 cw(c5840,6777) 5848,6777 5848,6739 ccw(c5865,6739) 5865,6722 5898,6722 cw(c5898,6715) 5905,6715 cw(c5897,6715) 5897,6707 5815,6707 ccw(c5815,6685) 5793,6685 5793,6605.03 5850.03,6548 6079.97,6548 6230,6698.03 6230,6946.97 6182,6994.97 6182,7060 6187,7065 6195,7065 6200.31,7059.69 v1(6200.31,7036.61)
  BOT w4: v1(1912.2,7098.11) 1923,7087.32 1923,7010.03 1946.51,6986.51 1950.03,6983 3313.94,6983 3451.94,6845 3591.06,6845 3611.06,6825 4056.06,6825 4118.77,6762.29 4227.29,6762.29 4265,6800 4270,6800 v1(4278,6792)
IL0.DDR.G3.D4_P: J3.65 J4.115 | length 5756.9
  TOP w4: J4.115@1937.2,7061.61 1950.7,7048.11 v1(1950.7,7036.61) ; v1(6161.81,7098.11) 6173.31,7098.11 J3.65@6186.81,7111.61
  S5(V) w4: v1(4278,6820) 4286,6812 4367,6812 ccw(c4367,6820) 4375,6820 ; 4375,6823 4375,6873 cw(c4395,6873) 4395,6893 cw(c4395,6874) 4414,6874 4414,6823 ccw(c4425,6823) 4425,6812 5153.2,6812 5194.69,6853.49 5198.2,6857 5742.97,6857 5795,6804.97 5795,6740 ccw(c5801,6740) 5801,6734 5816,6734 ccw(c5816,6739) 5821,6739 5821,6778 cw(c5840,6778) 5840,6797 cw(c5840,6777) 5860,6777 5860,6739 ccw(c5865,6739) 5865,6734 5898,6734 cw(c5898,6715) 5917,6715 cw(c5897,6715) 5897,6695 5815,6695 ccw(c5815,6685) 5805,6685 5805,6610 5855,6560 6075,6560 6218,6703 6218,6942 6170,6990 6170,7089.92 v1(6161.81,7098.11)
  BOT w4: v1(1950.7,7036.61) 1950.7,7074.3 1945,7080 1940,7080 1935,7075 1935,7015 1955,6995 3318.91,6995 3456.91,6857 3596.03,6857 3616.03,6837 4061.03,6837 4123.74,6774.29 4222.32,6774.29 4260.03,6812 4270,6812 v1(4278,6820)
IL0.DDR.G3.S_N: J3.79 J4.119 | length 5963.5
  TOP w4: v1(1912.2,7248.11) 1923.7,7248.11 J4.119@1937.2,7261.61 ; J3.79@6136.81,6911.61 6150.31,6898.11 v1(6150.31,6886.61)
  S1(V) w4: v1(1912.2,7248.11) 1912.2,7232.2 1905,7225 1900,7225 1895,7230 1895,7420 1921,7446 3388.09,7446 4149.09,6685 5185,6685 5230,6640 5230,6383.03 5280.03,6333 5719.97,6333 5762,6375.03 5762,6412 cw(c5780,6412) 5780,6430 5925.5,6430 ccw(c5925.5,6453) 5948.5,6453 5948.5,6460 ccw(c5926.5,6460) 5926.5,6482 5777,6482 cw(c5777,6497) 5762,6497 5762,6515 cw(c5767,6515) 5767,6520 5799,6520 ccw(c5799,6525) 5804,6525 ccw(c5799,6525) 5799,6530 5767,6530 cw(c5767,6535) 5762,6535 5762,6635.03 5811.97,6685 5910,6685 6111.61,6886.61 v1(6150.31,6886.61)
IL0.DDR.G3.S_P: J3.78 J4.118 | length 5964
  TOP w4: J4.118@1937.2,7211.61 1950.7,7198.11 v1(1950.7,7186.61) ; v1(6115,6935) 6125,6945 6125,6949.8 J3.78@6136.81,6961.61
  S1(V) w4: v1(1950.7,7186.61) 1927.32,7210 1895,7210 1883,7222 1883,7424.97 1916.03,7458 3393.06,7458 4154.06,6697 5189.97,6697 5242,6644.97 5242,6388 5285,6345 5715,6345 5750,6380 5750,6412 cw(c5780,6412) 5780,6442 5926.5,6442 ccw(c5926.5,6452) 5936.5,6452 5936.5,6460 ccw(c5926.5,6460) 5926.5,6470 5772,6470 cw(c5772,6492) 5750,6492 5750,6640 5807,6697 5905.03,6697 6115,6906.97 v1(6115,6935)
IL0.SDR.G8.D0_N: J3.116 J4.29 | length 5924.4
  TOP w4: v1(1462.2,7248.11) 1473.7,7248.11 J4.29@1487.2,7261.61 ; J3.116@5936.81,7061.61 5950.31,7048.11 v1(5950.31,7036.61)
  S2(H) w4: v1(1462.2,7248.11) 1462.2,7232.2 1455,7225 1450,7225 1445,7230 1445,7408.03 1772,7735.03 1772,7775 ccw(c1752,7775) 1752,7795 1630,7795 cw(c1630,7805) 1620,7805 cw(c1630,7805) 1630,7815 1800,7815 cw(c1800,7810) 1805,7810 1805,7800 ccw(c1810,7800) 1810,7795 ccw(c1810,7800) 1815,7800 1815,7810 cw(c1820,7810) 1820,7815 3468.03,7815 4492.03,6791 5732.97,6791 5905,6963.03 5905,7053.03 5915.99,7064.01 5934.41,7064.01 5950.31,7048.11 v1(5950.31,7036.61)
IL0.SDR.G8.D0_P: J3.115 J4.28 | length 5929.1
  TOP w4: J4.28@1487.2,7211.61 1500.7,7198.11 v1(1500.7,7186.61) ; v1(5911.81,7098.11) 5923.31,7098.11 J3.115@5936.81,7111.61
  S2(H) w4: v1(1500.7,7186.61) 1477.32,7210 1445,7210 1433,7222 1433,7413 1760,7740 1760,7775 ccw(c1752,7775) 1752,7783 1630,7783 cw(c1630,7805) 1608,7805 cw(c1630,7805) 1630,7827 3473,7827 4497,6803 5728,6803 5893,6968 5893,7058 5911.81,7076.81 v1(5911.81,7098.11)
IL0.SDR.G8.D1_N: J3.103 J4.33 | length 5845.9
  TOP w4: v1(1512.2,6948.11) 1523.7,6948.11 J4.33@1537.2,6961.61 ; J3.103@5986.81,7211.61 6000.2,7225 v1(6010,7225)
  S5(V) w4: v1(1512.2,6948.11) 1535.59,6924.73 1567.91,6924.73 1579.91,6912.73 1579.91,6872.06 1595,6856.97 1595,6810 cw(c1573,6810) 1573,6788 1447,6788 ccw(c1447,6780) 1439,6780 ccw(c1449,6780) 1449,6770 1575,6770 cw(c1575,6750) 1595,6750 1595,6514 1719,6390 3558.03,6390 4233.32,7065.29 4234.21,7065.29 4313.71,7144.79 4313.71,7145.68 4610.03,7442 5818,7442 5992,7268 5992,7233 6000,7225 v1(6010,7225)
IL0.SDR.G8.D1_P: J3.102 J4.32 | length 5848.4
  TOP w4: J4.32@1537.2,6911.61 1550.7,6898.11 v1(1550.7,6886.61) ; v1(5960,7232.4) 5960,7234.8 J3.102@5986.81,7261.61
  S5(V) w4: v1(1550.7,6886.61) 1550.7,6902.52 1557.91,6909.73 1562.91,6909.73 1567.91,6904.73 1567.91,6867.09 1583,6852 1583,6810 cw(c1573,6810) 1573,6800 1447,6800 ccw(c1447,6780) 1427,6780 ccw(c1449,6780) 1449,6758 1570.03,6758 cw(c1570.03,6745.03) 1583,6745.03 1583,6685 cw(c1578,6685) 1578,6680 1560,6680 ccw(c1560,6675) 1555,6675 ccw(c1560,6675) 1560,6670 1578,6670 cw(c1578,6665) 1583,6665 1583,6509.03 1714.03,6378 3563,6378 4238.29,7053.29 4239.18,7053.29 4325.71,7139.82 4325.71,7140.71 4615,7430 5813.03,7430 5980,7263.03 5980,7235 5977.4,7232.4 v1(5960,7232.4)
IL0.SDR.G8.D2_N: J3.106 J4.36 | length 5775.1
  TOP w4: v1(1512.2,7098.11) 1523.7,7098.11 J4.36@1537.2,7111.61 ; J3.106@5986.81,7061.61 6000.31,7048.11 v1(6000.31,7036.61)
  S5(V) w4: v1(5838,6622) 5846,6630 5881.97,6630 5947,6695.03 5947,6965 ccw(c5927,6965) 5927,6985 5810,6985 cw(c5810,6990) 5805,6990 cw(c5813,6990) 5813,6998 5966,6998 5982,7014 5982,7060 5987,7065 5995,7065 6000.31,7059.69 v1(6000.31,7036.61)
  BOT w4: v1(1512.2,7098.11) 1523,7087.32 1523,6975.03 1529,6969.03 1529,6923.97 1521.49,6916.46 1521.49,6857.54 1534,6845.03 1534,6781 1668,6647 3499.21,6647 3499.38,6646.83 3507.33,6646.83 3708.16,6446 4162.68,6446 4363.5,6646.83 5773.17,6646.83 5790,6630 5830,6630 v1(5838,6622)
IL0.SDR.G8.D2_P: J3.105 J4.35 | length 5760.4
  TOP w4: J4.35@1537.2,7061.61 1550.7,7048.11 v1(1550.7,7036.61) ; v1(5961.81,7098.11) 5973.31,7098.11 J3.105@5986.81,7111.61
  S5(V) w4: v1(5838,6650) 5846,6642 5877,6642 5935,6700 5935,6965 ccw(c5927,6965) 5927,6973 5810,6973 cw(c5810,6990) 5793,6990 cw(c5813,6990) 5813,7010 5961.03,7010 5970,7018.97 5970,7089.92 v1(5961.81,7098.11)
  BOT w4: v1(1550.7,7036.61) 1550.7,7074.3 1545,7080 1540,7080 1535,7075 1535,6980 1540,6975 1541,6974 1541,6919 1533.49,6911.49 1533.49,6862.51 1546,6850 1546,6785.97 1672.97,6659 3504.18,6659 3504.35,6658.83 3512.3,6658.83 3713.13,6458 4157.71,6458 4358.53,6658.83 5778.14,6658.83 5794.97,6642 5830,6642 v1(5838,6650)
IL0.SDR.G8.D3_N: J3.109 J4.26 | length 5967.6
  TOP w4: J4.26@1487.2,7111.61 1485.63,7111.61 1486.42,7112.4 v1(1511.81,7137.8) ; v1(5965,6889.8) J3.109@5986.81,6911.61
  S1(V) w4: v1(1511.81,7137.8) 1503.14,7137.8 1488.38,7152.56 1488.38,7161.23 1482,7167.61 1482,7202.03 1495,7215.03 1495,7355 cw(c1500,7355) 1500,7360 1524.5,7360 ccw(c1524.5,7365) 1529.5,7365 ccw(c1524.5,7365) 1524.5,7370 1500,7370 cw(c1500,7375) 1495,7375 1495,7433.07 1781.42,7719.49 1982.47,7719.49 ccw(c1982.47,7741.14) 2004.13,7741.14 ccw(c1982.28,7741.14) 1982.28,7762.98 1874.81,7762.98 cw(c1874.81,7787.4) 1850.89,7782.48 cw(c1874.81,7787.4) 1850.39,7787.4 cw(c1876.99,7787.4) 1876.99,7814 3566,7814 3635,7745 3635,7604.09 4456.09,6783 5804.06,6783 5929.86,6908.8 5946,6908.8 v1(5965,6889.8)
IL0.SDR.G8.D3_P: J3.108 J4.25 | length 5965.7
  TOP w4: v1(1462.6,7089.57) 1487.2,7064.96 J4.25@1487.2,7061.61 ; v1(5965,6939.8) J3.108@5986.81,6961.61
  S1(V) w4: v1(1462.6,7089.57) 1476.38,7103.35 1476.38,7156.26 1470,7162.64 1470,7207 1483,7220 1483,7438.04 1776.45,7731.49 1982.47,7731.49 ccw(c1982.47,7741.14) 1992.13,7741.14 ccw(c1982.28,7741.14) 1982.28,7750.98 1874.81,7750.98 cw(c1874.81,7787.4) 1838.39,7787.4 cw(c1876.99,7787.4) 1839.05,7794.48 cw(c1876.99,7787.4) 1876.99,7826 3570.97,7826 3647,7749.97 3647,7609.06 4461.06,6795 5799.09,6795 5924.89,6920.8 5946,6920.8 v1(5965,6939.8)
IL0.SDR.G13.C_N: J3.83 J4.3 | length 5774.6
  TOP w4: v1(1362.2,6948.11) 1373.7,6948.11 J4.3@1387.2,6961.61 ; J3.83@6086.81,7211.61 6100.31,7198.11 v1(6100.31,7186.61)
  S5(V) w4: v1(1362.2,6948.11) 1362.2,6933.8 1366.89,6929.11 1373.14,6929.11 1378,6933.97 1378,7163 1433,7218 1433,7413 1440,7420 1562,7542 1615,7542 ccw(c1615,7552) 1625,7552 1625,7617 cw(c1645,7617) 1645,7637 cw(c1645,7620) 1662,7620 1662,7550 ccw(c1670,7550) 1670,7542 3745.03,7542 3825.03,7622 3884,7622 v1(3892,7630)
  BOT w4: v1(3892,7630) 3900,7622 4294.97,7622 4402.97,7514 5892.97,7514 5894.97,7512 6095,7311.97 6095,7215 6100.31,7209.69 v1(6100.31,7186.61)
IL0.SDR.G13.C_P: J3.82 J4.2 | length 5771.8
  TOP w4: v1(1362.2,6898.11) 1373.7,6898.11 J4.2@1387.2,6911.61 ; v1(6061.81,7248.11) 6073.31,7248.11 J3.82@6086.81,7261.61
  S5(V) w4: v1(1362.2,6898.11) 1362.2,6911.2 1368.11,6917.11 1378.11,6917.11 1390,6929 1390,7158.03 1445,7213.03 1445,7408.03 1566.97,7530 1615,7530 ccw(c1615,7552) 1637,7552 1637,7617 cw(c1645,7617) 1645,7625 cw(c1645,7620) 1650,7620 1650,7545.03 ccw(c1665.03,7545.03) 1665.03,7530 1695,7530 cw(c1695,7525) 1700,7525 1700,7510 ccw(c1705,7510) 1705,7505 ccw(c1705,7510) 1710,7510 1710,7525 cw(c1715,7525) 1715,7530 3750,7530 3830,7610 3884,7610 v1(3892,7602)
  BOT w4: v1(3892,7602) 3900,7610 4290,7610 4378,7522 4398,7502 5888,7502 6083,7307 6083,7238 6080,7235 6074.93,7235 v1(6061.81,7248.11)
IL0.SDR.G13.D0_N: J3.86 J4.6 | length 5847.2
  TOP w4: J4.6@1387.2,7111.61 1368.2,7092.61 1347.61,7092.61 1301.65,7046.65 1301.65,6958.35 1330,6930 1330,6881.97 1323.03,6875 1315,6875 1267,6923 1267,6973 ccw(c1250,6973) 1250,6990 ccw(c1250,6972) 1232,6972 1232,6908 1377.71,6762.29 6082.29,6762.29 6097,6777 6097,6790 v1(6105,6798) ; J3.86@6086.81,7061.61 6100.31,7048.11 v1(6100.31,7036.61)
  S5(V) w4: v1(6100.31,7036.61) 6100.31,7059.69 6095,7065 6087,7065 6082,7060 6082,7014.97 6097,6999.97 6097,6806 v1(6105,6798)
IL0.SDR.G13.D0_P: J3.85 J4.5 | length 5848.3
  TOP w4: J4.5@1387.2,7061.61 1368.2,7080.61 1352.58,7080.61 1313.65,7041.68 1313.65,6963.32 1338.49,6938.49 1342,6934.97 1342,6877 1328,6863 1310.03,6863 1306.51,6866.51 1255,6918.03 1255,6973 ccw(c1250,6973) 1250,6978 ccw(c1250,6972) 1244,6972 1244,6912.97 1382.68,6774.29 1400,6774.29 ccw(c1400,6779.29) 1405,6779.29 1405,6805 cw(c1410,6805) 1410,6810 cw(c1410,6805) 1415,6805 1415,6779.29 ccw(c1420,6779.29) 1420,6774.29 6077.32,6774.29 6085,6781.97 6085,6790 v1(6077,6798) ; v1(6061.81,7098.11) 6073.31,7098.11 J3.85@6086.81,7111.61
  S5(V) w4: v1(6061.81,7098.11) 6070,7089.92 6070,7010 6085,6995 6085,6806 v1(6077,6798)
IL0.SDR.G13.D1_N: J3.89 J4.9 | length 5846.6
  TOP w4: J4.9@1387.2,7261.61 1372.7,7261.61 1353.7,7242.61 1265.64,7242.61 1208,7184.97 1208,6822 1292,6738 5840,6738 5933,6645 6011.97,6645 6025.66,6658.69 v1(6035,6658.69) ; v1(6065,6885) 6065,6889.8 J3.89@6086.81,6911.61
  S5(V) w4: v1(6035,6658.69) 6035,6670 6045,6680 6045,6923.21 6050,6928.21 6060,6928.21 6065,6923.21 v1(6065,6885)
IL0.SDR.G13.D1_P: J3.88 J4.8 | length 5843.3
  TOP w4: J4.8@1387.2,7211.61 1372.7,7211.61 1353.7,7230.61 1270.61,7230.61 1220,7180 1220,7135 ccw(c1225,7135) 1225,7130 1240,7130 cw(c1240,7125) 1245,7125 cw(c1240,7125) 1240,7120 1225,7120 ccw(c1225,7115) 1220,7115 1220,6826.97 1296.97,6750 5844.97,6750 5937.97,6657 6007,6657 6016.19,6666.19 v1(6016.19,6677.5) ; v1@6065.1,6983.33 J3.88@6086.81,6961.61
  S5(V) w4: v1(6016.19,6677.5) 6025.5,6677.5 6033,6685 6033,6928.18 6045.03,6940.21 6060,6940.21 6065.2,6945.41 v1(6065.2,6983.42)
IL0.SDR.G13.D2_N: J3.93 J4.13 | length 5846.4
  TOP w4: v1(1412.2,6948.11) 1423.7,6948.11 J4.13@1437.2,6961.61 ; J3.93@6036.81,7211.61 6050.2,7225 v1(6060,7225)
  S5(V) w4: v1(1412.2,6948.11) 1435.59,6924.73 1474.41,6924.73 1480,6930.32 1480,6964.97 1491.03,6976 1576.29,6976 1588.94,6963.35 1592.45,6959.83 1592.45,6939.52 1634.99,6896.98 1634.99,6880.11 1647,6868.1 1647,6624.97 1666.97,6605 1710,6605 cw(c1710,6583) 1732,6583 1732,6457 ccw(c1740,6457) 1740,6449 ccw(c1740,6459) 1750,6459 1750,6585 cw(c1770,6585) 1770,6605 3739.09,6605 4223.38,7089.29 4224.27,7089.29 4289.71,7154.73 4289.71,7155.62 4600.09,7466 5854.91,7466 6042,7278.91 6042,7233 6050,7225 v1(6060,7225)
IL0.SDR.G13.D2_P: J3.92 J4.12 | length 5836.7
  TOP w4: J4.12@1437.2,6911.61 1450.7,6898.11 v1(1450.7,6886.61) ; v1(6012,7250) 6025.2,7250 J3.92@6036.81,7261.61
  S5(V) w4: v1(1450.7,6886.61) 1450.7,6902.52 1457.91,6909.73 1476.38,6909.73 1488.49,6921.83 1492,6925.35 1492,6960 1496,6964 1571.32,6964 1580.45,6954.86 1580.45,6934.55 1622.99,6892.01 1622.99,6875.13 1635,6863.13 1635,6785 cw(c1630,6785) 1630,6780 1612,6780 ccw(c1612,6775) 1607,6775 ccw(c1612,6775) 1612,6770 1630,6770 cw(c1630,6765) 1635,6765 1635,6620 1662,6593 1710,6593 cw(c1710,6583) 1720,6583 1720,6457 ccw(c1740,6457) 1740,6437 ccw(c1740,6459) 1762,6459 1762,6580.03 cw(c1774.97,6580.03) 1774.97,6593 3744.06,6593 4228.35,7077.29 4229.24,7077.29 4301.71,7149.76 4301.71,7150.65 4605.06,7454 5849.94,7454 6030,7273.94 6030,7245 6025,7240 6020,7240 6012,7248 v1(6012,7250)
IL0.SDR.G13.D3_N: J3.96 J4.16 | length 5775.3
  TOP w4: v1(1412.2,7098.11) 1423.7,7098.11 J4.16@1437.2,7111.61 ; J3.96@6036.81,7061.61 6050.31,7048.11 v1(6050.31,7036.61)
  S5(V) w4: v1(5873,6582) 5881,6590 5955,6590 5966,6601 6023,6601 ccw(c6023,6620) 6042,6620 ccw(c6022,6620) 6022,6640 6015,6640 cw(c6015,6658) 5997,6658 5997,6992 6032,7027 6032,7056 6037,7061 6045,7061 6050.31,7055.69 v1(6050.31,7036.61)
  BOT w4: v1(1412.2,7098.11) 1423,7087.32 1423,6975.03 1429,6969.03 1429,6923.97 1421.49,6916.46 1421.49,6857.54 1434,6845.03 1434,6806 1617,6623 3489.27,6623 3489.44,6622.83 3497.39,6622.83 3698.22,6422 4172.62,6422 4373.44,6622.83 5750,6622.83 5782.83,6590 5865,6590 v1(5873,6582)
IL0.SDR.G13.D3_P: J3.95 J4.15 | length 5769.2
  TOP w4: J4.15@1437.2,7061.61 1450.7,7048.11 v1(1450.7,7036.61) ; v1(6011.81,7098.11) 6023.31,7098.11 J3.95@6036.81,7111.61
  S5(V) w4: v1(5873,6610) 5881,6602 5950.03,6602 5961.03,6613 6023,6613 ccw(c6023,6620) 6030,6620 ccw(c6022,6620) 6022,6628 6015,6628 cw(c6015,6658) 5985,6658 5985,6996.97 6020,7031.97 6020,7089.92 v1(6011.81,7098.11)
  BOT w4: 1440,6975 1435,6980 1435,7075 1440,7080 1445,7080 1450.7,7074.3 v1(1450.7,7036.61) ; 1441,6974 1441,6919 1433.49,6911.49 1433.49,6862.51 1446,6850 1446,6810.97 1621.97,6635 3494.24,6635 3494.41,6634.83 3502.36,6634.83 3703.19,6434 4167.65,6434 4368.47,6634.83 5754.97,6634.83 5787.8,6602 5865,6602 v1(5873,6610)
IL0.SDR.G13.D4_N: J3.99 J4.19 | length 5962
  TOP w4: v1(1412.2,7248.11) 1423.7,7248.11 J4.19@1437.2,7261.61 ; v1@6013.62,6934.81 J3.99@6036.81,6911.61
  S1(V) w4: v1(1412.2,7248.11) 1412.2,7227.2 1405.66,7220.66 1399.34,7220.66 1392,7228 1392,7400.03 1829.97,7838 3740,7838 cw(c3740,7810) 3768,7810 3768,7785 cw(c3763,7785) 3763,7780 3740,7780 ccw(c3740,7775) 3735,7775 ccw(c3740,7775) 3740,7770 3763,7770 cw(c3763,7765) 3768,7765 3768,7750 cw(c3750,7750) 3750,7732 3681,7732 ccw(c3681,7710) 3659,7710 3659,7614.03 4466.03,6807 5748.97,6807 5753.49,6811.51 5753.49,6812.01 5899.48,6958 5978.05,6958 5983.03,6953.02 5995.22,6953.02 v1(6013.43,6934.81)
IL0.SDR.G13.D4_P: J3.98 J4.18 | length 5966.6
  TOP w4: J4.18@1437.2,7211.61 1450.7,7198.11 v1(1450.7,7186.61) ; v1(6015.19,6983.23) J3.98@6036.81,6961.61
  S1(V) w4: v1(1450.7,7186.61) 1428.66,7208.66 1394.37,7208.66 1380,7223.03 1380,7405 1825,7850 3740,7850 cw(c3740,7810) 3780,7810 3780,7750 cw(c3750,7750) 3750,7720 3681,7720 ccw(c3681,7710) 3671,7710 3671,7619 4471,6819 5743.51,6819 5894.51,6970 5983.02,6970 5988,6965.02 5996.98,6965.02 v1(6015.19,6983.23)
IL0.SDR.G13.D5_N: J3.113 J4.23 | length 5813.9
  TOP w4: v1(1462.2,6948.11) 1473.7,6948.11 J4.23@1487.2,6961.61 ; J3.113@5936.81,7211.61 5950.31,7198.11 v1(5950.31,7186.61)
  S6(H) w4: v1(1462.2,6948.11) 1485.59,6924.73 1517.91,6924.73 1529.91,6912.73 1529.91,6872.06 1547,6854.97 1547,6820.03 cw(c1526.97,6820.03) 1526.97,6800 1435,6800 ccw(c1435,6790) 1425,6790 ccw(c1438,6790) 1438,6777 1525,6777 cw(c1525,6755) 1547,6755 1547,6735.03 cw(c1526.97,6735.03) 1526.97,6715 1435,6715 ccw(c1435,6705) 1425,6705 ccw(c1438,6705) 1438,6692 1525,6692 cw(c1525,6670) 1547,6670 1547,6643 1583,6607 3782.03,6607 4617.83,7442.8 5849.17,7442.8 5938.49,7353.49 5942,7349.97 5942,7194.92 v1(5950.31,7186.61)